# Altium PCB CE_BJTInfineonSOT343_Simple_v2.PcbDoc
Units mm, origin at the board's own origin, x right, y up, seen from the top; angles counter-clockwise.
Board outline 28.19 x 9.02 mm, 2 copper layers (Top Layer, Bottom Layer); 15 components, 7 nets, 34 pads, 4 vias.
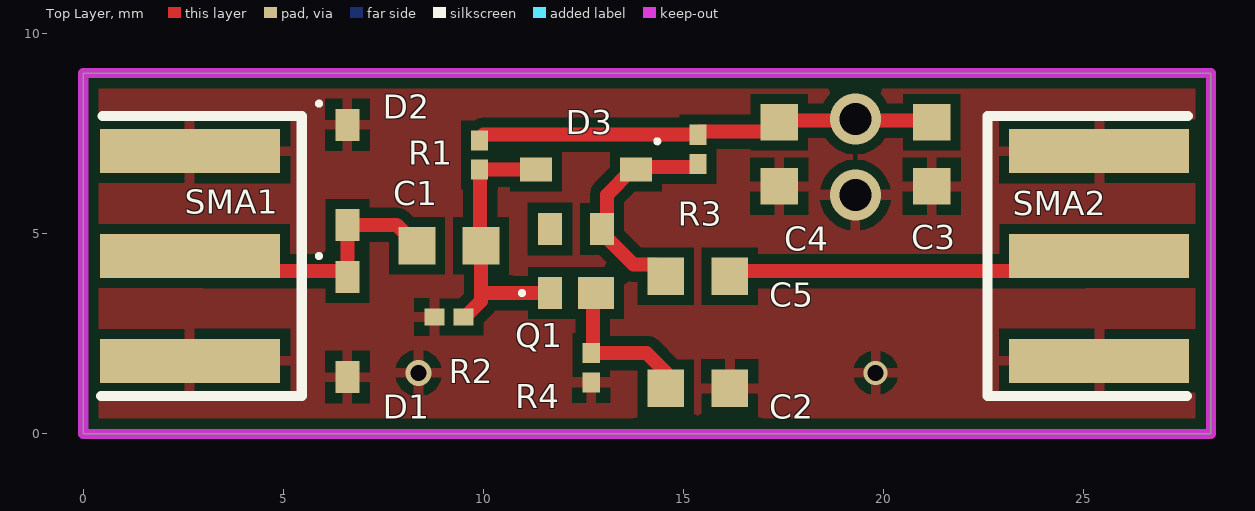
[diagram p0: Top Layer view]
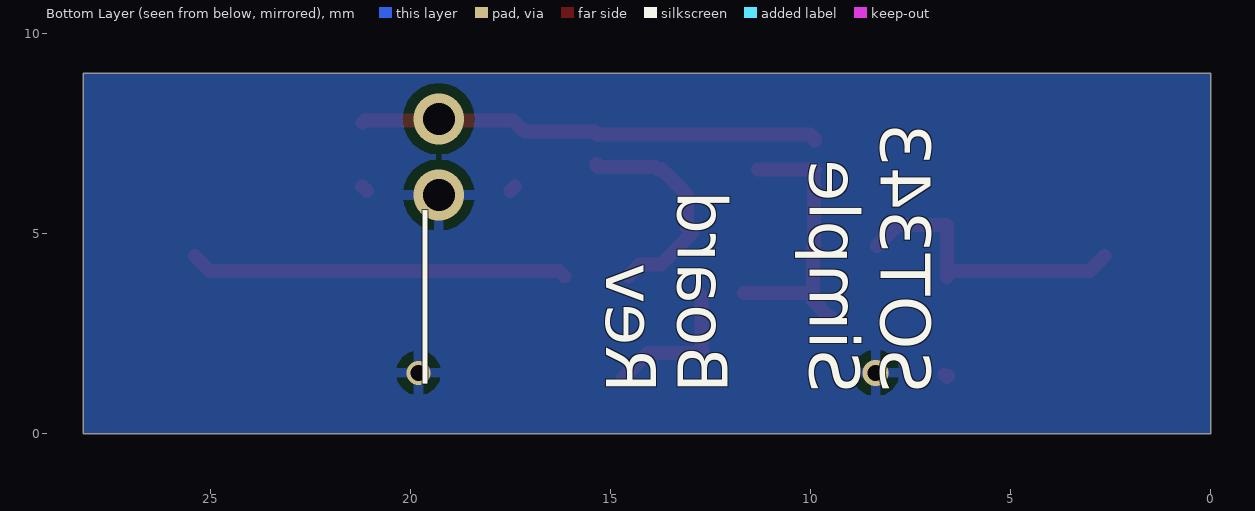
[diagram p1: Bottom Layer view, seen from below]

## Layer stack, top to bottom
Top Solder: solder mask 0.0102, Solder Resist, Dk 3.5
Top Layer: signal copper 0.0356
Dielectric 1: dielectric 0.32, FR-4, Dk 4.8
Bottom Layer: signal copper 0.0356
Bottom Solder: solder mask 0.0102, Solder Resist, Dk 3.5

## Board outline
0,0 28.194,0 28.194,9.017 0,9.017

## Design rules (kind name [scope] priority, off if disabled: settings)
Clearance [All] p1: gap=0.254 ignorepadtopadclearanceinfootprint=FALSE except(0: Arc-Hole Track-Hole SMDPad-Hole THPad-Hole Via-Hole Fill-Hole Poly-Hole Region-Hole Text-Hole)
PolygonConnect [All] p1: connectstyle=Relief reliefconductorwidth=0.254 reliefentries=4 polygonreliefangle="90 Angle" airgapwidth=0.254
RoomDefinition CE_BJTInfineonSOT343_Simple_v2 [InComponentClass('CE_BJTInfineonSOT343_Simple_v2')] p1: confinementstyle=ConfineIn formatcopy=TRUE lockcomponents=FALSE outline 0,0 28.194,0 28.194,9.017 0,9.017
RoutingVias [All] p1: holewidth=0.711 width=1.27 viastyle="Through Hole" minholewidth=0.711 minwidth=1.27 maxholewidth=0.711 maxwidth=1.27
SolderMaskExpansion [All] p1: expansion=0.102
Width [All] p1: maxlimit=0.5 minlimit=0.254 preferedwidth=0.35 toplayer_minwidth=0.35 minimp=50.000000 maximp=50.000000 favimp=50.000000
30 further rules are at their usual default settings.

## Components (designator, comment, footprint, x,y, rotation, side; value= is the part's Value field where it differs from the comment)
C1 "Part Number: ECH-U1C182GX5" CAP_K1 9.144,4.699 r0 top value=Value
C2 "Part Number: ECH-U1C182GX5" CAP_K1 15.367,1.143 r180 top value=Value
C3 "Part Number: ECH-U1C182GX5" CAP_K1 21.209,6.985 r90 top value=Value
C4 "Part Number: ECH-U1C182GX5" CAP_K1 17.399,6.985 r90 top value=Value
C5 "Part Number: ECH-U1C182GX5" CAP_K1 15.367,3.937 r0 top value=Value
D1 "" INF-SOD323_V 6.604,2.667 r0 top
D2 "" INF-SOD323_V 6.604,6.477 r0 top
D3 "" INF-SOD323_V 12.573,6.604 r270 top
Q1 "SOT343" INF-SOT343_V 12.319,4.318 r90 top
R1 "" RES_RC0201_P6XP3 9.906,6.97 r90 top value=Value
R2 "" RES_RC0201_P6XP3 9.144,2.921 r0 top value=Value
R3 "" RES_RC0201_P6XP3 15.367,7.112 r90 top value=Value
R4 "" RES_RC0201_P6XP3 12.7,1.651 r90 top value=Value
SMA1 "SMA_conn" SMA_conn 2.667,4.445 r270 top
SMA2 "SMA_conn" SMA_conn 25.4,4.445 r90 top

## Footprints (in the part's own frame and the unit in brackets; to place one, negate y for a bottom-side part, rotate by r counter-clockwise, add the part's x,y. Pads: shape width x height; smd on the part's side, far side on the other; paste and mask are expansions set on the pad)
CAP_K1 [mil]
  rect 36x37 smd paste+0 mask+0: 1(-31.5,0) 2(31.5,0)
  body extent 0,0 10,10, height 10
INF-SOD323_V [mm] "SOD, 2-Leads, Body 1.7x1.25 mm"
  rect 0.6x0.8 smd: 1(0,1.25) 2(0,-1.25)
  silkscreen extent -0.76,1.73 -0.66,1.83, body extent -0.63,-0.85 0.63,0.85, height 1.1
INF-SOT343_V [mm] "SOT343, 4-Leads, Body 2x1.25 mm"
  rect 0.8x0.6 smd: 1(-0.8,0.65) 3(0.8,-0.65) 4(0.8,0.65)
  rect 0.8x0.9 smd: 2(-0.8,-0.5)
  silkscreen extent -0.85,1.3 -0.75,1.4, body extent -0.63,-1 0.63,1, height 1
RES_RC0201_P6XP3 [mm]
  rect 0.503x0.43 smd paste+0 mask+0: 1(-0.366,0) 2(0.366,0)
  body extent 0,0 0.25,0.25, height 0.25
SMA_conn [mm]
  rect 1.1x4.5 smd: GND(-2.62,0) GND(2.62,0) SIG(0,0)
  silkscreen extent -3.5,-2.21 3.5,2.79

## Part data
C1 C2 C3 C4 C5: library part ECH-U1C182GX5, "No Description Available", Built_By=EMA_UL_Team, Copyright="Copyright (C) 2018 Accelerated Designs. All rights reserved", Manufacturer_Part_Number=ECH-U1C182GX5, RefDes=RefDes, Type=DEV, Vendor=Panasonic
D1 D2 D3: library part BAT15-03W, "Single Silicon Schottky Diode, 110 mA IF Max, SOD32, Green", Manufacturer=Infineon, Supplier Part Number 1=N/A, ComponentLink1Description="Manufacturer URL", ComponentLink1URL=http://www.infineon.com/, ComponentLink2Description=Datasheet, ComponentLink2URL=http://www.infineon.com/dgdl/bat15series.pdf?folderId=db3a304314dca3890114ff6812070b44&fileId=db3a304314dca3890114ff6b74ca0b48&location=en.Products.RF.RF_Mixer___Detector_Schottky_Diodes.DATASHEET.bat15series.pdf, ComponentLink3Description="Package Specification", ComponentLink3URL=http://www.infineon.com/dgdl/SOD323-Package_Overview.pdf?folderId=db3a30431936bc4b011952aab84f3bbe&fileId=db3a30431936bc4b011952beed653be3, Configuration=Single, CT (typ)="0.26 pF", DatasheetVersion=Jun-2011, Green=yes, Group="RF Mixer", IF (max)="110 mA", Mounting Technology="Surface Mount", PackageDescription="2-Pin Small Outline Diode Package, 1.25 x 1.7 mm Body", PackageReference=SOD323, PartNumber=BAT15-03W, Supplier 1=Mouser, VF (typ)="0.23 V", VR (max)="4 V"
Q1: library part BFP840ESD, "Robust Low Noise Silicon Germanium Bipolar RF Transistor, 2.25 V VCEO, 35 mA IC, 33.5 dB Gmax, SOT343, Green", Manufacturer=Infineon, ComponentLink1Description="Manufacturer URL", ComponentLink1URL=http://www.infineon.com/, ComponentLink2Description=Datasheet, ComponentLink2URL=http://www.infineon.com/dgdl/Infineon_Robust_WiFi_SiGe_LNA_BFP840ESD_Rev1_1.pdf?folderId=db3a30431f848401011fcbf2ab4c04c4&fileId=db3a304336ca04c90136e88a4d5f35b7&location=en.Products.RF.RF_Transistors_.Ultra_Low_Noise_SiGe_C_Transistors_for_use_up_to_12_GHz.DATASHEET.Infineon_Robust_WiFi_SiGe_LNA_BFP840ESD_Rev1_1.pdf, ComponentLink3Description="Package Specification", ComponentLink3URL=http://www.infineon.com/dgdl/SOT343-Package_Overview.pdf?folderId=db3a30431936bc4b0119535155343cba&fileId=db3a30431936bc4b0119535a9f393cd3, DatasheetVersion="Rev. 1.1", Gmax (typ)="33.5 dB", Green=yes, Group="Robust ultra low noise SiGe", Halogen-free=yes, IC (max)="35 mA", Mounting Technology="Surface Mount", NFmin (typ)="0.6 dB", PackageDescription="4-Pin Small Outline Transistor Package, 1.25 x 2 mm Body", PackageReference=SOT343, PartNumber=BFP840ESD, Ptot (max)="75.0 mW", VCEO (max)="2.25 V"
R1 R2 R3 R4: library part RC0201FR-0718KL, "No Description Available", Built_By=EMA_Anthony, Copyright="Copyright (C) 2018 Accelerated Designs. All rights reserved", Manufacturer_Part_Number=RC0201FR-0718KL, RefDes=RefDes, Type=DEV, Vendor=Yageo

## Via types
v1: diameter 1.27, hole 0.8, Top Layer to Bottom Layer, 2 vias
v2: diameter 0.6, hole 0.4, Top Layer to Bottom Layer, 1 vias
v3: diameter 0.65, hole 0.4, Top Layer to Bottom Layer, 1 vias

## Nets (pads, with @x,y where several pads share a name; then routed paths per layer and width w, separated by ;. In a path a pad name is that pad's centre, name@x,y a point inside that pad or via, vN(x,y) a via of type N, cw(c..) or ccw(c..) an arc to the next point about the centre after c; other vN are vias at no path point)
B: C1.2 D3.2 Q1.1 R1.1 R2.2 | length 7.1
  Top Layer w0.35: R2.2 9.546,2.921 9.944,3.319 9.944,3.556 ; D3.2 R1.1 9.925,6.585 9.925,4.718 C1.2 9.944,3.556 ; Q1.1 9.982,3.518 9.944,3.556
C: C5.1 D3.1 Q1.3 R3.1 | length 5.7
  Top Layer w0.35: C5.1 14.567,3.95 14.285,4.232 13.755,4.232 12.969,5.018 13.094,5.143 13.094,5.975 13.723,6.604 D3.1 13.894,6.675 15.327,6.675 15.367,6.715 R3.1
E: C2.2 Q1.2 R4.2 | length 3.8
  Top Layer w0.35: Q1.2 12.74,3.439 12.74,2.057 R4.2 14.087,2.017 14.694,1.41 C2.2@14.694,1.397
GND: C2.1 C3.1 C4.1 D1.2 D2.1 R2.1 R4.1 SMA1.GND SMA2.GND | length 1
  Top Layer w0.35: D1.2@6.571,1.45 D1.2 D1.2@6.658,1.47 ; v3@8.328,1.47 v3(8.382,1.524) ; v3@8.382,1.605 v3(8.382,1.524) ; v3@8.463,1.524 v3(8.382,1.524) ; C4.1 C4.1@17.507,6.077 ; v1@19.196,6.077 v1(19.304,5.969) v1@19.412,6.077 ; C3.1@21.101,6.077 C3.1 C3.1@21.222,6.185
  other v2: 19.812,1.524
Vcc: C3.2 C4.2 R1.2 R3.2 | length 11.6
  Top Layer w0.35: R1.2 9.906,7.372 10.012,7.478 R3.2 15.367,7.514 15.407,7.554 17.168,7.554 C4.2 17.443,7.83 19.26,7.83 v1(19.304,7.874) 19.348,7.83 21.165,7.83 C3.2
Vin: C1.1 D1.1 D2.2 SMA1.SIG | length 7.4
  Top Layer w0.35: SMA1.SIG 3.042,4.07 6.479,4.07 D1.1@6.604,3.945 ; D1.1 D1.1@6.604,3.945 ; C1.1 8.344,4.712 7.829,5.227 D2.2 6.604,4.07 D1.1@6.604,3.945
Vout: C5.2 SMA2.SIG | length 9.4
  Top Layer w0.35: C5.2 16.3,4.07 25.025,4.07 SMA2.SIG
pads on no net: Q1.4

## Polygon pours and split planes (outlines as drawn)
GND on Top Layer (solid, pour order 0): 28.194,9.017 0,9.017 0,0 28.194,0
GND on Bottom Layer (solid, pour order 2): 28.194,9.017 0,9.017 0,0 28.194,0

## Keep-outs
Top Layer:
  the board outline again, w0.254

## Silkscreen, mask and mechanical layers (free items; w line width, h text height)
Bottom Overlay:
  text "_____" at 19.304,1.27 h1.25 r90
  text "SOT343" at 8.255,1.016 h1.25 r90
  text "Simple" at 10.033,1.016 h1.25 r90
  text "Board" at 13.335,1.016 h1.25 r90
  text "Rev" at 15.113,1.016 h1.25 r90